# Altium PCB 3代7次发射系统.PcbDoc
Units mm, origin at the board's own origin, x right, y up, seen from the top; angles counter-clockwise.
Board outline 31.01 x 37.34 mm, 2 copper layers (Top Layer, Bottom Layer); 89 components, 63 nets, 272 pads, 114 vias.
Unrouted connection lines stored in the file: 1.
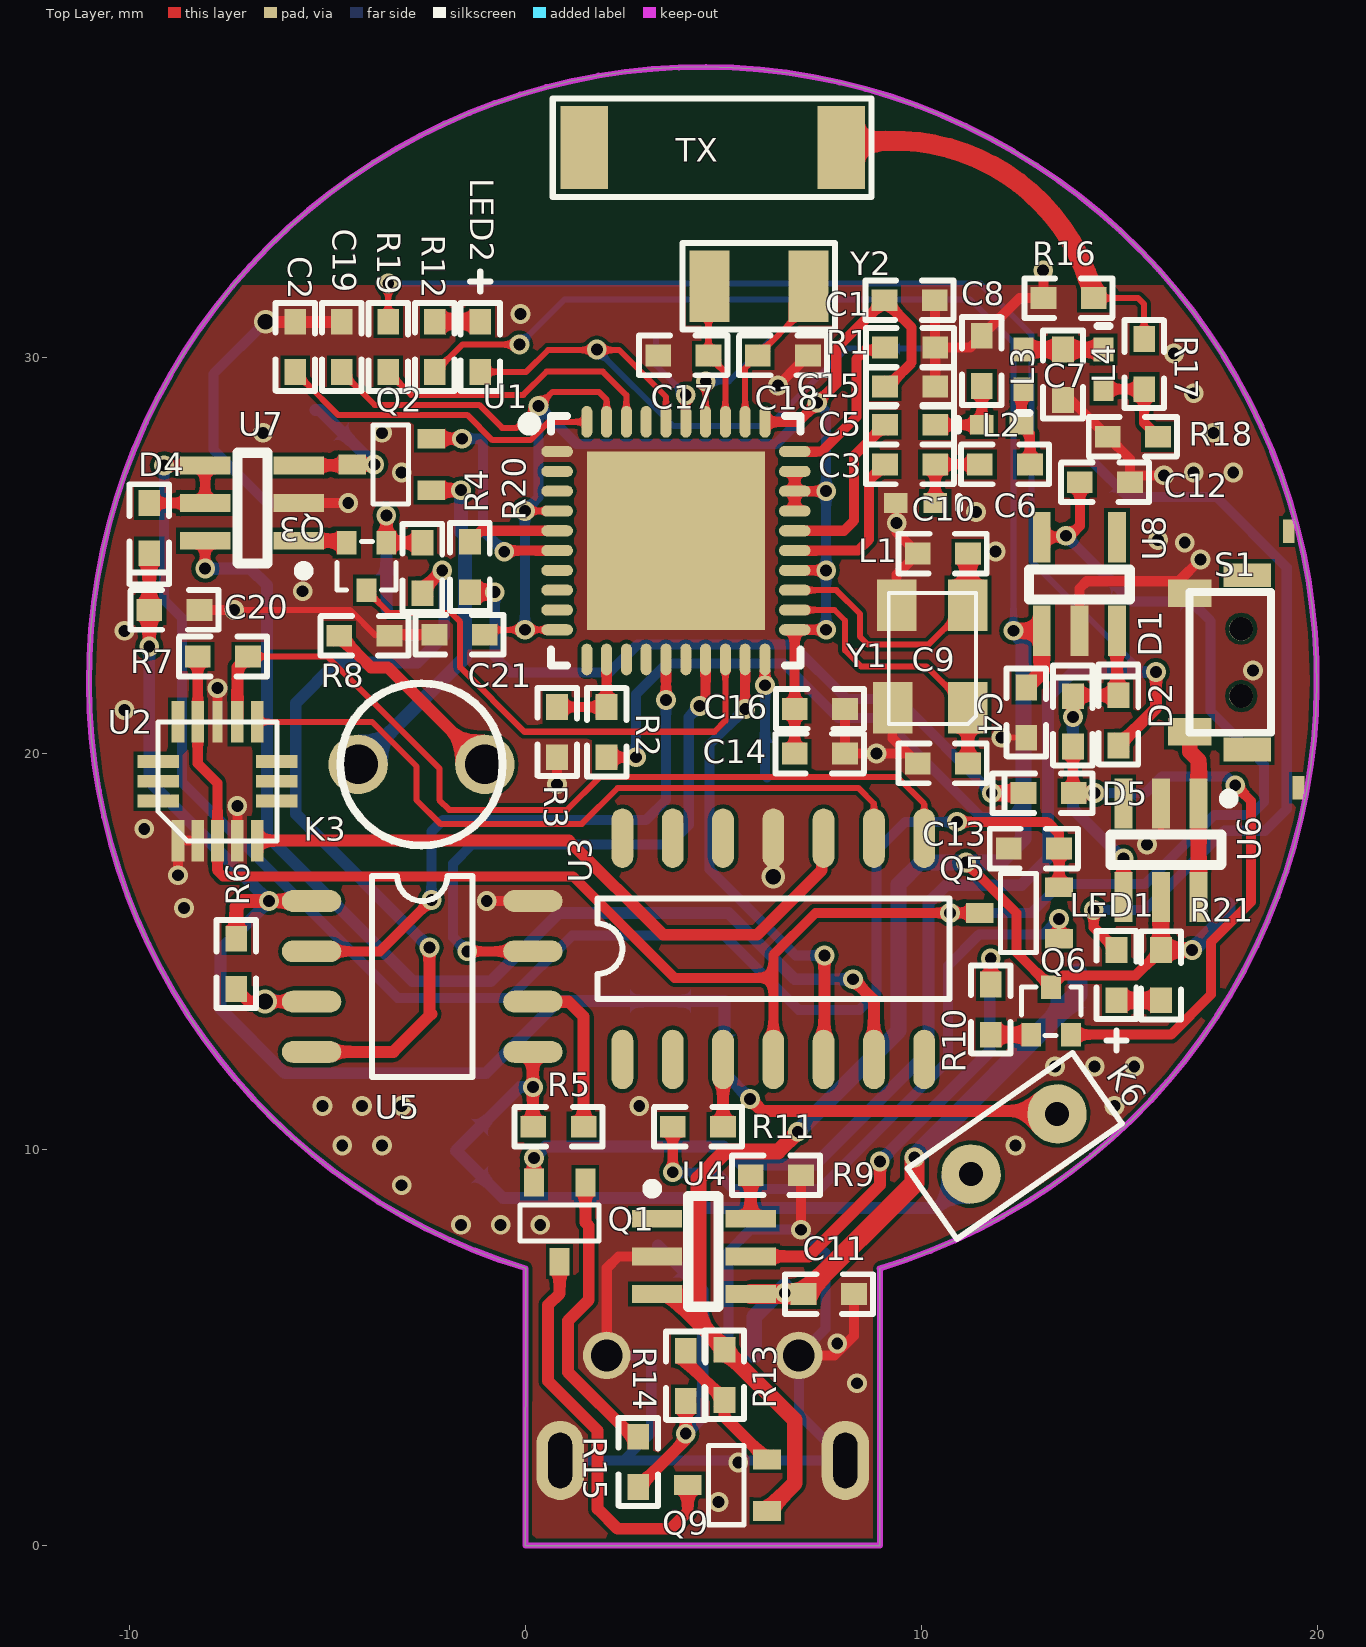
[diagram p0: Top Layer view]
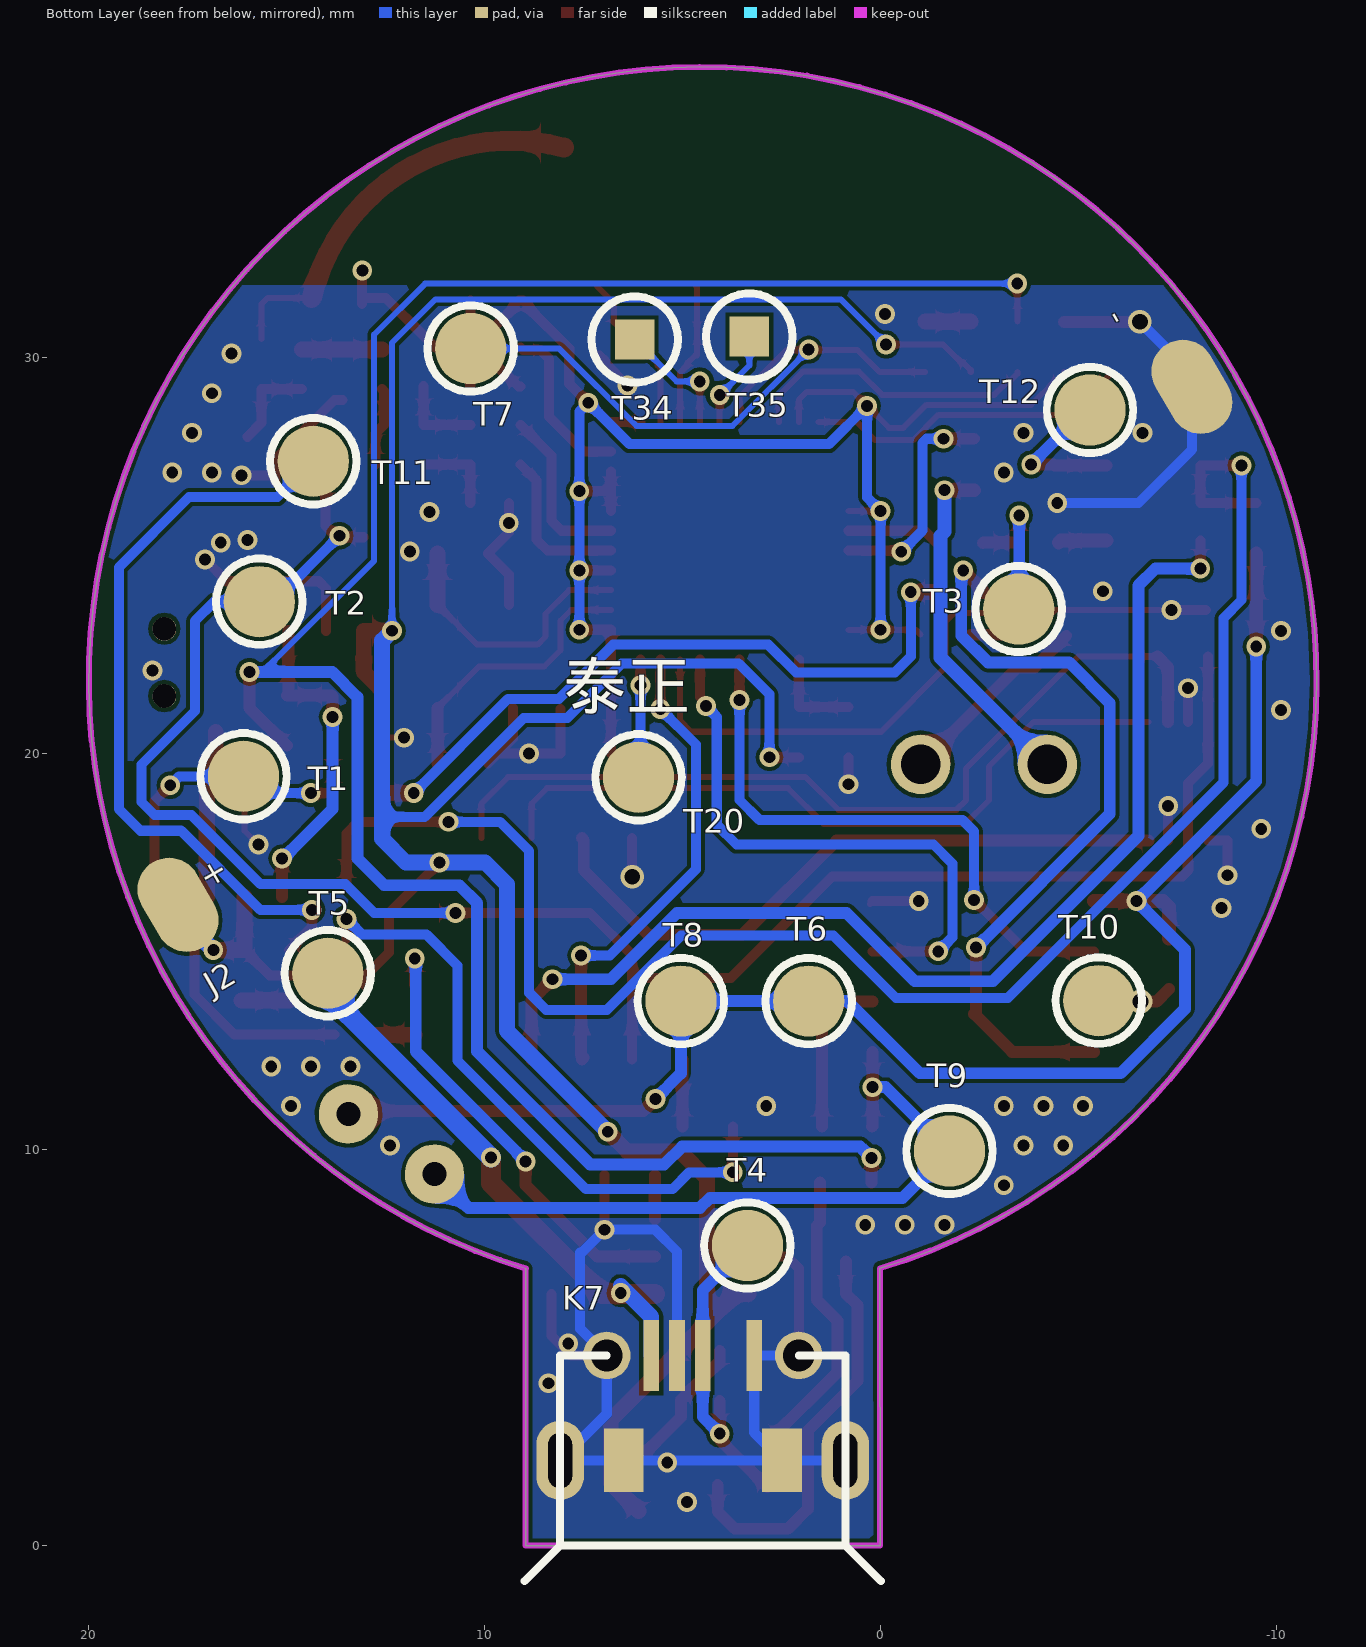
[diagram p1: Bottom Layer view, seen from below]

## Layer stack, top to bottom
Top Layer: signal copper 0.0356
Dielectric: dielectric 0.32, FR-4, Dk 4.8
Bottom Layer: signal copper 0.0356

## Board outline
0,0 0.003,7 cw(c4.475,21.841) 7.931,36.951 7.931,36.95 cw(c4.482,21.838) 8.947,6.996 8.95,6.985 8.95,0

## Design rules (kind name [scope] priority, off if disabled: settings)
Clearance [All] p1: gap=0.1
Clearance poly [All] p2 off: gap=0.15 // Protel DXP Scope 1 Expression Was: inpolygon
ComponentClearance [All] p1: gap=0.203 collisioncheckmode=3 verticalgap=0.254 showdistances=FALSE
FabricationTestPointUsage TestPointUsage [All] p1: valid=0 allowmultiple=FALSE
FabricationTestpoint Testpoint [(IsPad And (OnTopLayer Or OnBottomLayer))] p1 off: side=3 testpointundercomponent=TRUE minsize=1.016 maxsize=2.54 preferedsize=1.524 minholesize=0 maxholesize=1.016 preferedholesize=0.813 testpointgrid=0.025 allowsidetop=TRUE allowsidebottom=TRUE usegrid=TRUE gridtolerance=0 // Protel DXP Scope 1 Expression Was: (IsPad And (OnTopLayer Or OnBottomLayer))
FanoutControl Fanout_Small [All] p1 off: bgadir=Out bgaviamode=Centered fanoutstyle=Auto fanoutdirection=Alternating viagrid=0.025 // Protel DXP Scope 1 Expression Was: (CompPinCount < 5)   Fanout_Small (Default Rule)
FanoutControl Fanout_Default [All] p2: bgadir=Out bgaviamode=Centered fanoutstyle=Auto fanoutdirection=Alternating viagrid=0.025 // Fanout_Default (Default Rule)
FanoutControl Fanout_SOIC [All] p3 off: bgadir=Out bgaviamode=Centered fanoutstyle=Auto fanoutdirection=Alternating viagrid=0.025 // Protel DXP Scope 1 Expression Was: IsSOIC   Fanout_SOIC (Default Rule)
FanoutControl Fanout_BGA [All] p4 off: bgadir=Out bgaviamode=Centered fanoutstyle=Auto fanoutdirection=Alternating viagrid=0.025 // Protel DXP Scope 1 Expression Was: IsBGA   Fanout_BGA (Default Rule)
FanoutControl Fanout_LCC [All] p5 off: bgadir=Out bgaviamode=Centered fanoutstyle=Auto fanoutdirection=Alternating viagrid=0.025 // Protel DXP Scope 1 Expression Was: IsLCC   Fanout_LCC (Default Rule)
PlaneConnect [All] p1: planeconnectstyle=Direct reliefexpansion=0.508 reliefentries=4 reliefconductorwidth=0.254 reliefairgap=0.254
PolygonConnect [All] p1: connectstyle=Direct reliefconductorwidth=0.508 reliefentries=4 polygonreliefangle="90 Angle" airgapwidth=0.254
PolygonConnect via [All] p2 off: connectstyle=Direct reliefconductorwidth=0.254 reliefentries=4 polygonreliefangle="90 Angle" airgapwidth=0.254 // Protel DXP Scope 1 Expression Was: isvia
RoutingVias [All] p1: holewidth=0.3 width=0.5 viastyle="Through Hole" minholewidth=0.3 minwidth=0.5 maxholewidth=0.3 maxwidth=0.5
SilkscreenOverComponentPads [IsPad] p1: minsilkscreentomaskgap=0.254
SolderMaskExpansion [All] p1: expansion=0.102
Width [All] p1: maxlimit=1.27 minlimit=0.127 preferedwidth=0.254 minimp=50.000000 maximp=50.000000 favimp=50.000000
18 further rules are at their usual default settings.

## Components (designator, comment, footprint, x,y, rotation, side; value= is the part's Value field where it differs from the comment)
C1 "" 0402_1 10.338,31.445 r180 top
C2 "" 0402_1 -5.814,29.632 r90 top
C3 "" 0402_1 10.35,27.3 r180 top (schematic designator C11)
C4 "105" 0402_1 12.65,20.4 r90 top
C5 "15P" 0402_1 10.35,28.3 r180 top
C6 "104" 0402_1 11.475,27.3 r0 top
C7 "15P" 0402_1 13.575,28.93 r90 top
C8 "15P" 0402_1 11.525,30.55 r270 top
C9 "15P" 0402_1 11.175,19.75 r180 top
C10 "15P" 0402_1 11.175,25.05 r180 top
C11 "" 0402_1 7.025,6.35 r0 top
C12 "105" 0402_1 14,26.85 r0 top
C13 "105" 0402_1 13.475,17.6 r180 top
C14 "2.2uF" 0402_1 8.07,20 r180 top
C15 "15P" 0402_1 10.35,29.267 r180 top
C16 "15P" 0402_1 6.8,21.125 r0 top
C17 "15P" 0402_1 4.623,30.052 r180 top
C18 "15P" 0402_1 5.867,30.052 r0 top
C19 "15P" 0402_1 -4.639,29.632 r90 top
C20 "105" 0402_1 -9.5,23.625 r0 top
C21 "15P" 0402_1 -1.025,23 r180 top
D1 "Diode 1N4007" 0402D 13.825,20.175 r90 top
D2 "Diode 1N4007" 0402D 14.975,20.2 r90 top
D4 "Diode 1N4007" 0402D -9.5,26.325 r270 top
D5 "Diode 1N4007" 0402D 13.85,19 r180 top
J2 "" J1 17,14.875 r240 bottom
K3 "" K3 -1.025,19.725 r180 top
K6 "" K6 14.797,11.861 r215 top locked
K7 "K7" MIRO_USB 4.478,4.8 r180 bottom locked
L1 "Inductor" 0402-A 9.85,26.325 r180 top
L2 "Inductor" 0402-A 12.025,28.3 r0 top
L3 "Inductor" 0402-A 12.575,29.7 r90 top
L4 "Inductor" 0402-A 14.6,29.7 r270 top
LED1 "LED0" 0402LED 14.925,13.767 r180 top
LED2 "LED0" 0402LED -1.139,30.907 r0 top (schematic designator LED1)
Q1 "8550" SOT-323 0.864,7.169 r180 top
Q2 "8550" SOT-323 -4.375,27.3 r90 top
Q3 "9014" SOT-523 -4.013,24.125 r180 top
Q5 "8550" SOT-323 11.475,15.975 r90 top
Q6 "8550" SOT-523 13.275,14.1 r0 top
Q9 "LED0" ? 4.1,1.525 r90 top
R1 "4K7" 0402_1 10.35,30.25 r180 top
R2 "" 0402_1 2.05,21.175 r270 top
R3 "1M" 0402_1 0.8,19.905 r90 top
R4 "100K" 0402_1 -2.6,24.05 r90 top
R5 "10K" 0402_1 0.2,10.575 r0 top
R6 "10K" 0402_1 -7.3,15.325 r270 top
R7 "10K" 0402_1 -8.275,22.45 r0 top
R8 "4.7K" 0402_1 -4.7,22.975 r0 top
R9 "2K" 0402_1 5.687,9.35 r0 top
R10 "10K" 0402_1 11.75,12.9 r90 top
R11 "4.7K" 0402_1 3.72,10.575 r0 top
R12 "10K" 0402_1 -2.289,29.632 r90 top (schematic designator R11)
R13 "10K" 0402_1 5.025,3.675 r90 top (schematic designator R11)
R14 "8.2K" 0402_1 4.05,3.65 r90 top (schematic designator R11)
R15 "500" 0402_1 2.85,1.475 r90 top (schematic designator R11)
R16 "1.2M" 0402_1 14.35,31.5 r180 top
R17 "2K" 0402_1 15.625,30.47 r270 top
R18 "10K" 0402_1 15.975,28 r180 top
R19 "10K" 0402_1 -3.464,30.907 r270 top
R20 "10K" 0402_1 -1.4,24.075 r90 top
R21 "4K7" 0402_1 16.05,15.037 r270 top
S1 "" 轻触侧按键2*4*3.5 18.075,22.3 r90 top locked
T1 "Component_1" TP#1 16.075,19.425 r0 top
T2 "Component_1" TP#1 15.675,23.836 r0 top
T3 "Component_1" TP#1 -3.5,23.65 r0 top
T4 "Component_1" TP#1 3.35,7.575 r0 top
T5 "Component_1" TP#1 13.945,14.453 r0 top
T6 "Component_1" TP#1 1.803,13.748 r0 top
T7 "Component_1" TP#1 10.338,30.226 r90 top
T8 "Component_1" TP#1 5.029,13.748 r0 top
T9 "Component_1" TP#1 -1.753,9.963 r0 top
T10 "Component_1" TP#1 -5.525,13.76 r0 top
T11 "Component_1" TP#1 14.312,27.381 r0 top
T12 "Component_1" TP#1 -5.3,28.675 r0 top
T20 "Component_1" TP#1 6.1,19.4 r0 top
T34 "Component_1" TP#2 6.198,30.455 r0 top
T35 "Component_1" TP#2 3.302,30.531 r0 top
TX "Antenna" ANT2 7.98,35.3 r180 top
U1 "U3" LC-QFN-40_6X6X05P 3.8,25.375 r270 top locked
U2 "U4" U2-4 -8.775,17.8 r90 top locked
U3 "U3" SOP14 2.45,12.275 r90 top
U4 "" SOT23-6 3.325,8.25 r0 top (schematic designator U1)
U5 "" SO-8 -5.4,16.275 r0 top locked
U6 "" SOT23-6 17,18.737 r270 top
U7 "" SOT23-6 -5.725,25.375 r180 top
U8 "" SOT23-5 13,23.1 r90 top
Y1 "Y1" XTAL_FA-128 10.225,22.45 r180 top
Y2 "XTAL" Y2 4.648,31.801 r0 top

## Footprints (in the part's own frame and the unit in brackets; to place one, negate y for a bottom-side part, rotate by r counter-clockwise, add the part's x,y. Pads: shape width x height; smd on the part's side, far side on the other; paste and mask are expansions set on the pad)
0402-A [mm]
  rect 0.6x0.5 smd: 1(-0.5,0) 2(0.5,0)
  silkscreen extent -1.1,-0.15 -1.1,0.15, body extent -0.55,-0.3 0.55,0.3, height 0.55
0402_1 [mm]
  rect 0.65x0.55 smd: 1(0,0) 2(1.27,0)
  silkscreen extent -0.48,-0.5 1.75,0.5
0402D [mm]
  rect 0.65x0.55 smd: 1(0,0) 2(1.27,0)
  silkscreen extent -0.48,-0.5 2.05,0.5
0402LED [mm]
  rect 0.55x0.65 smd: 1(0,0) 2(0,-1.27)
  silkscreen extent -0.5,-1.75 0.5,1.27
ANT2 [mm]
  rect 1.2x2.1 smd: 1(0,0) 2(6.5,0)
  silkscreen extent -0.76,-1.24 7.29,1.24
J1 [mm]
  oval 2.5x1.6 smd: 1(-1.495,0.021) 2(-0.021,28.734)
K3 [mm]
  round 1.5 hole 1: 1(0,0) 2(3.2,0)
  silkscreen extent -0.45,-2.05 3.65,2.05
K6 [mm]
  round 1.5 hole 0.6: 1(1.675,0) 2(4.325,0)
  silkscreen extent 0.47,-1.04 5.56,1.14
LC-QFN-40_6X6X05P [mm]
  oval 0.28x0.8 smd mask+0.051: 1(-2.25,-3) 2(-1.75,-3) 3(-1.25,-3) 4(-0.75,-3) 5(-0.25,-3) 6(0.25,-3) 7(0.75,-3) 8(1.25,-3) 9(1.75,-3) 10(2.25,-3) 21(2.25,3) 22(1.75,3) 23(1.25,3) 24(0.75,3) 25(0.25,3) 26(-0.25,3) 27(-0.75,3) 28(-1.25,3) 29(-1.75,3) 30(-2.25,3)
  oval 0.8x0.28 smd mask+0.051: 11(3,-2.25) 12(3,-1.75) 13(3,-1.25) 14(3,-0.75) 15(3,-0.25) 16(3,0.25) 17(3,0.75) 18(3,1.25) 19(3,1.75) 20(3,2.25) 31(-3,2.25) 32(-3,1.75) 33(-3,1.25) 34(-3,0.75) 35(-3,0.25) 36(-3,-0.25) 37(-3,-0.75) 38(-3,-1.25) 39(-3,-1.75) 40(-3,-2.25)
  rect 4.5x4.5 smd mask+0.051: 41(0,0)
  silkscreen extent -3.15,-3.85 3.15,3.15
MIRO_USB [mm]
  rect 0.4x1.8 smd: 1(-1.3,0) 2(-0.65,0) 3(0,0) 5(1.3,0)
  oval 1.2x2 hole 0.6 slot 1.4 at 90 deg: 6(-3.6,-2.65) 7(3.6,-2.65)
  round 1.2 hole 0.8: 6(-2.425,0) 7(2.425,0)
  rect 1x1.6 smd: 6(-2,-2.65) 7(2,-2.65)
  silkscreen extent -4.5,-5.7 4.5,0
SO-8 [mm]
  oval 1.5x0.55 smd: 1(0,0) 2(0,-1.27) 3(0,-2.54) 4(0,-3.81) 5(5.588,-3.81) 6(5.588,-2.54) 7(5.588,-1.27) 8(5.588,0)
  silkscreen extent 1.52,-4.44 4.06,0.64
SOP14 [mm]
  oval 1.5x0.55 smd: 1(0,0) 2(0,-1.27) 3(0,-2.54) 4(0,-3.81) 5(0,-5.08) 6(0,-6.35) 7(0,-7.62) 8(5.588,-7.62) 9(5.588,-6.35) 10(5.588,-5.08) 11(5.588,-3.81) 12(5.588,-2.54) 13(5.588,-1.27) 14(5.588,0)
  silkscreen extent 1.52,-8.25 4.06,0.64
SOT23-5 [mm]
  rect 1.27x0.45 smd: 1(0,-0.041) 2(0,-0.991) 3(0,-1.941) 4(2.362,-1.941) 5(2.362,-0.041)
  silkscreen extent 0.79,-2.26 1.55,0.28
SOT23-6 [mm]
  rect 1.27x0.45 smd: 1(0,0) 2(0,-0.95) 3(0,-1.9) 4(2.362,-1.9) 5(2.362,-0.95) 6(2.362,0)
  silkscreen extent -0.25,-2.22 1.55,0.89
SOT-323 [mm]
  rect 0.5x0.7 smd: B(-0.65,-2) C(0,0) E(0.65,-2)
  silkscreen extent -1,-1.43 1,-0.53
SOT-523 [mm]
  rect 0.5x0.6 smd: B(-0.5,-1.2) C(0,0) E(0.5,-1.2)
  silkscreen extent -0.75,-1.22 0.75,0
TP#1 [mm]
  round 1.8 smd far side: 1(0,0)
TP#2 [mm]
  rect 1x1 smd far side: 1(0,0)
U2-4 [mm]
  rect 1.05x0.32 smd: 1(0,0) 2(0,-0.5) 3(0,-1) 4(0,-1.5) 5(0,-2) 9(3,-2) 10(3,-1.5) 12(3,-0.5) 13(3,0)
  round 0.7 on Top Overlay: 1(0.1,0.9)
  rect 0.32x1.05 smd: 6(1,-2.5) 7(1.5,-2.5) 8(2,-2.5) 14(2,0.5) 15(1.5,0.5) 16(1,0.5)
  rect 1.05x0.25 smd: 11(3,-1)
  silkscreen extent 0,-2.5 3,0.51
XTAL_FA-128 [mm]
  rect 1x1.3 smd mask+0.08: 1(-0.95,1.3) 2(0.85,-1.3) 3(-0.95,-1.3) 4(0.95,1.3)
  silkscreen extent -1.15,-1.6 1.05,1.7
Y2 [mm]
  rect 1x1.8 smd: 1(0,0) 2(2.5,0)
  silkscreen extent -0.69,-1.09 3.17,1.09
轻触侧按键2*4*3.5 [mm]
  rect 0.7x1.1 smd: 1(-1.75,1.3) 2(1.75,1.3)
  rect 0.6x1.2 smd: ""(-2.2,-0.15) ""(2.2,-0.15)
  round 0.6 hole 0.6 unplated: ""(-0.85,0) ""(0.85,0)
  silkscreen extent -1.78,-0.75 1.78,1.3
? [mm]
  rect 0.5x0.7 smd: a(-0.65,-2) g(0.65,-2) k(0,0)
  silkscreen extent -1,-1.43 1,-0.53

## Part data
C2 C3: library part Cap, "Capacitor"
K6: library part J1
R1: library part Res2, "Resistor"

## Free pads (board coordinates)
  rect 0.3x0.6 smd: 0(19.275,25.611) 0(19.525,19.136)

## Via types
v1: diameter 0.5, hole 0.3, Top Layer to Bottom Layer, tented both sides, 111 vias
v2: diameter 0.6, hole 0.4, Top Layer to Bottom Layer, tented both sides, 3 vias

## Nets (pads, with @x,y where several pads share a name; then routed paths per layer and width w, separated by ;. In a path a pad name is that pad's centre, name@x,y a point inside that pad or via, vN(x,y) a via of type N, cw(c..) or ccw(c..) an arc to the next point about the centre after c; other vN are vias at no path point)
+: C4.2 J2.1 Q6.C Q9.a R2.2 R12.1 R13.2 R21.1 U4.3 U6.5 U8.1 | length 80.6
  Top Layer w0.152: R12.1 -2.289,29.682 -2.091,29.88 -2.041,29.88 -1.593,30.328 v1(-0.152,30.328)
  Top Layer w0.254: R2.2 v1(2.795,19.905) ; v1(11.125,17.25) 12.4,15.975 12.4,14.975 Q6.C 13.575,14.4 15.413,14.4 R21.1
  Top Layer w0.4: U4.3 3.644,6.35 4.369,5.625 ; Q9.a 6.8,1.575 6.8,3.17 R13.2 5.025,4.969 4.369,5.625 ; v1(6.877,10.45) 6.377,9.95 5.05,9.95 4.369,9.269 4.369,5.625 ; v1(12.325,23.1) U8.1 13.041,22.061 C4.2 ; U6.5 R21.1 v1(16.837,15.037)
  Bottom Layer w0.152: v1(-0.152,30.328) 0.991,31.471 11.227,31.471 12.325,30.372 v1(12.325,23.1)
  Bottom Layer w0.254: v1(2.795,19.905) 2.795,21.5 3.57,22.275 6.525,22.275 7.9,20.9 9,20.9 11.5,18.4 12.575,18.4
  Bottom Layer w0.4: v1(6.877,10.45) 9.425,12.998 9.425,16.7 9.975,17.25 v1(11.125,17.25) 11.975,17.25 12.575,17.85 12.575,18.4 12.575,22.85 v1(12.325,23.1) ; v1(16.837,15.037) 17.729,15.929 J2.1
GND: C1.1 C2.2 C4.1 C7.1 C8.1 C9.2 C10.2 C11.2 C12.2 C13.2 C14.1 C15.1 C16.2 C17.2 C18.2 C19.2 C20.2 C21.2 J2.2 K7.2 K7.5 K7.6 K7.7 L1.2 R1.1 R3.1 R8.2 R9.2 R16.2 R18.2 S1.2 U1.1 U1.41 U2.1@-8.775,17.8 U2.2 U2.4 U2.11 U3.11 U4.2 U5.8 U6.2 U7.2 U8.2 Y1.2 Y1.4 | length 78.3
  Top Layer w0.152: v1(-7.355,23.625) -4.425,23.625 -3.775,22.975 R8.2 ; U5.8 U5.8@0.261,16.202 ; v1(12.025,20.4) C4.1 ; v1(15.7,17.7) 16.05,18.05 U6.2
  Top Layer w0.254: v1(-8.775,16.925) -8.775,17.8 U2.2 ; C20.2 v1(-7.355,23.625) ; U2.11 v1(-7.775,21.65) ; U2.4 v1(-7.275,18.675) ; U7.2 v1(-4.475,26.325) ; v1(-0.975,16.275) U5.8 ; v1(0.8,19.225) R3.1 ; K7.7@2.053,4.8 2.053,7.003 2.35,7.3 U4.2 ; v2(6.26,16.89) U3.11 ; v1(6.377,29.292) 6.939,29.854 6.939,29.904 7.087,30.052 C18.2 ; K7.6@6.903,4.8 7.8,4.8 8.295,5.295 C11.2 ; v1(6.957,7.975) R9.2 ; C16.2 C14.1 v1(8.863,20) C9.2@9.655,20 ; Y1.4 9.275,20.38 C9.2@9.655,20 ; Y1.2 9.375,24.52 C10.2 9.375,25.58 L1.2@9.375,26.325 ; C9.2 C9.2@9.655,20 ; C1.1 10.338,30.262 R1.1 ; C15.1 R1.1 ; v1(13.075,32.2) 13.085,32.19 R16.2@13.085,31.35 ; R16.2 12.475,31.5 C8.1 11.225,30.25 R1.1 ; C7.1 13.775,28.93 R18.2 15.27,27.435 C12.2@15.27,27.025 ; U8.2 13.991,24.166 14.175,24.35 16.5,24.35 v1(17.05,24.9) ; C12.2 C12.2@15.27,27.025 ; v1(16.125,27.025) C12.2@15.27,27.025
  Top Layer w0.3: v2(-6.56,30.902) C2.2 C19.2 ; R8.2 -3.405,23 C21.2
  Bottom Layer w0.254: v2(-6.56,30.902) -7.874,29.587 J2.2 -7.874,27.674 -6.525,26.325 v1(-4.475,26.325) ; K7.7@0.878,2.15 K7.7@2.478,2.15 ; K7.7@2.053,4.8 K7.5 3.178,2.85 K7.7@2.478,2.15 ; K7.2 5.128,7.425 5.678,7.975 v1(6.957,7.975) 7.532,7.4 7.575,7.4 7.575,5.472 6.903,4.8 6.903,3.325 8.078,2.15 6.478,2.15 K7.7@2.478,2.15
  other v1: 4.875,1.098 5.375,2.098 8.375,4.098 7.875,5.098 -1.625,8.098 -0.625,8.098 0.375,8.098 -3.125,9.098 -4.625,10.098 -3.625,10.098 12.375,10.098 -5.125,11.098 -4.125,11.098 -3.125,11.098 2.875,11.098 14.875,11.098 13.375,12.098 14.375,12.098 15.375,12.098 -8.625,16.098 -9.625,18.098 -10.125,21.098 18.375,22.098 -10.125,23.098 -5.625,24.098 11.875,25.098 16.65,25.325 15.975,25.394 9.375,25.825 11.375,26.098 -3.125,27.098 16.875,27.098 17.875,27.098 -6.625,28.098 -3.625,28.098 17.375,28.098 16.875,29.098 16.375,30.098 -0.125,31.098
NetC1_2: C1.2 C14.2 C15.2 C16.1 C19.1 C21.1 U1.4 U1.10 U1.21 U1.24 U1.27 U1.28 U1.29 U1.31 U1.39 | length 44.6
  Top Layer w0.152: C19.1 -4.639,29.582 -4.441,29.383 -4.391,29.383 -3.811,28.804 -1.168,28.804 -0.587,28.222 -0.226,28.222 v1(0.33,28.778) 0.684,29.132 1.854,29.132 2.05,28.936 U1.39 ; C21.1 -0.9,23.125 v1(-0.013,23.125) U1.10 ; v1(-0.013,26.125) U1.4
  Top Layer w0.254: U1.31 6.887,28.375 v1(7.368,28.857) 7.85,29.338 7.85,30.227 8.87,31.247 8.87,31.297 9.018,31.445 C1.2 9.118,31.445 9.266,31.297 9.266,31.247 9.754,30.759 9.754,29.87 9.298,29.415 9.278,29.415 9.13,29.267 C15.2 ; C14.2 C16.1 U1.21 v1(7.595,23.125) ; U1.24 v1(7.595,24.625) ; U1.27 U1.28 ; U1.29 U1.28 ; v1(7.595,26.625) U1.28
  Bottom Layer w0.254: v1(-0.013,23.125) v1(-0.013,26.125) 0.33,26.469 v1(0.33,28.778) 1.295,27.813 6.325,27.813 v1(7.368,28.857) 7.595,28.63 v1(7.595,26.625) v1@7.595,24.739 ; v1(7.595,23.125) v1(7.595,24.625) ; v1@7.652,24.682 v1@7.709,24.625
NetC2_1: C2.1 U1.40 | length 8.3
  Top Layer w0.152: C2.1 -5.814,29.582 -5.616,29.383 -5.566,29.383 -4.734,28.551 -1.47,28.551 -0.833,27.915 0.128,27.915 0.589,28.375 U1.40
NetC3_1: C3.1 C6.1 L1.1 | length 2.1
  Top Layer w0.254: L1.1 C3.1 C6.1
NetC3_2: C3.2 U1.25 | length 4.1
  Top Layer w0.254: U1.25 8.4,25.125 8.675,25.4 8.675,26.895 C3.2
NetC5_1: C5.1 C8.2 L2.1 | length 2.2
  Top Layer w0.254: C5.1 L2.1 C8.2
NetC5_2: C5.2 U1.26 | length 4.3
  Top Layer w0.254: U1.26 8.045,25.625 8.3,25.88 8.3,27.52 C5.2
NetC6_2: C6.2 L2.2 L3.1 | length 2
  Top Layer w0.254: L3.1 12.525,29.15 L2.2 12.745,28.08 C6.2
NetC7_2: C7.2 L3.2 L4.1 | length 2
  Top Layer w0.4: L3.2 C7.2 L4.1
NetC9_1: C9.1 U1.22 Y1.1 | length 7.2
  Top Layer w0.152: U1.22 7.805,23.625 8.07,23.36 8.07,22.605 8.475,22.2 10.125,22.2 Y1.1
  Top Layer w0.3: C9.1 Y1.1
NetC10_1: C10.1 U1.23 Y1.3 | length 7
  Top Layer w0.152: U1.23 7.85,24.125 8.45,23.525 8.45,22.95 8.65,22.75 10.175,22.75 Y1.3
  Top Layer w0.4: Y1.3 C10.1
NetC11_1: C11.1 K7.1 T5.1 U4.4 | length 14.6
  Top Layer w0.5: U4.4 C11.1 9.825,9.15 v1(9.825,9.8)
  Bottom Layer w0.4: K7.1 5.778,5.778 6.55,6.55 v1(6.55,6.375)
  Bottom Layer w0.5: v1(9.825,9.8) 13.945,13.92 T5.1
NetC12_1: C12.1 Q5.C R7.1 T2.1 U2.3 U2.12 U3.4 U8.5 | length 50
  Top Layer w0.254: R7.1 U2.12 -8.275,19.75 -7.775,19.25 U2.3 -7.775,17.036 -7.639,16.9 1.2,16.9 3.765,14.335 6.26,14.335 ; U3.4 6.26,14.335 ; Q5.C v1(10.725,15.975) 7.325,15.975 6.26,14.91 6.26,14.335 ; U8.5 13.712,25.462 14,25.75 C12.1
  Bottom Layer w0.254: v1(10.725,15.975) 12.775,15.975 13.5,16.7 15.644,16.7 17.394,18.45 18.325,18.45 18.65,18.775 18.65,19.725 17.3,21.075 17.3,23.35 16.814,23.836 T2.1 15.314,23.836 v1(13.65,25.5)
NetC13_1: C13.1 D4.1 Q5.E U7.4 U7.5 | length 43
  Top Layer w0.254: D4.1 U7.5 U7.4 v1(-9.125,27.275) ; v1(10.9,18.275) 13.175,18.275 13.475,17.975 C13.1 Q5.E
  Bottom Layer w0.254: v1(-9.125,27.275) -9.125,23.875 -8.675,23.425 -8.675,19.275 -3.225,13.825 -0.4,13.825 1.175,15.4 5.027,15.4 6.902,13.525 8.43,13.525 8.863,13.957 8.863,17.538 9.6,18.275 v1(10.9,18.275)
NetC17_1: C17.1 U1.33 Y2.1 | length 3.6
  Top Layer w0.152: Y2.1 4.623,31.775 C17.1 4.673,30.052 4.872,29.853 4.872,29.803 5.05,29.625 U1.33
NetC18_1: C18.1 U1.32 Y2.2 | length 4.1
  Top Layer w0.152: U1.32 5.55,29.735 5.619,29.803 5.619,29.853 5.817,30.052 C18.1 5.917,30.052 6.116,30.251 6.116,30.301 6.724,30.909 6.724,31.377 Y2.2
NetC20_1: C20.1 D4.2 K6.1 R6.1 T6.1 T8.1 U5.1 | length 40.7
  Top Layer w0.3: v1(5.675,11.275) 5.975,10.975 K6.1@13.35,10.975
  Top Layer w0.35: v1(-9.5,22.7) C20.1 D4.2 ; R6.1 -7.3,16.125 -7.15,16.275 v1(-6.475,16.275) U5.1
  Bottom Layer w0.3: v1(-9.5,22.7) -9.5,19.3 v1(-6.475,16.275) -7.7,15.05 -7.7,13.55 -6.075,11.925 -1,11.925 0.823,13.748 T6.1 T8.1 5.029,11.921 v1(5.675,11.275)
NetD1_1: D1.1 D5.1 Q6.E T1.1 | length 15.4
  Top Layer w0.254: Q6.E 16.3,12.9 17.314,13.914 17.314,15.239 18.325,16.25 18.325,18.8 v1(17.925,19.2) ; D1.1 13.825,19.025 D5.1 v1(14.375,19)
  Bottom Layer w0.254: v1(14.375,19) 15.65,19 T1.1 17.7,19.425 v1(17.925,19.2)
NetD1_2: D1.2 D2.2 U6.4 U8.3 | length 8.4
  Top Layer w0.3: v1(13.825,20.925) D1.2 13.85,21.47 D2.2 14.941,21.504 U8.3 ; U6.4 v1(15.1,17.35)
  Bottom Layer w0.3: v1(13.825,20.925) 13.825,18.6 15.075,17.35 v1(15.1,17.35)
NetD2_1: D2.1 Q1.E R19.1 | length 56
  Top Layer w0.152: R19.1 v1(-3.464,31.867)
  Top Layer w0.3: Q1.E v1(0.214,9.786) ; D2.1 15.925,21.15 v1(15.925,22.061)
  Bottom Layer w0.152: v1(-3.464,31.867) 11.491,31.867 12.776,30.582 12.776,24.867 15.582,22.061
  Bottom Layer w0.3: v1(0.214,9.786) 0.502,10.075 5,10.075 5.45,9.625 7.325,9.625 10.175,12.475 10.175,16.225 10.625,16.675 12.525,16.675 13.2,17.35 13.2,21.425 13.836,22.061 15.582,22.061 v1(15.925,22.061)
NetD5_2: D5.2 R20.1 | length 17.6
  Top Layer w0.4: R20.1 v1(-0.775,24.075) ; v1(11.775,19) D5.2
  Bottom Layer w0.254: v1(-0.775,24.075) -0.775,22.45 -0.375,22.05 2.125,22.05 2.825,22.75 6.739,22.75 8.114,21.375 9.4,21.375 v1(11.775,19)
NetK3_1: K3.1 R8.1 | length 5
  Top Layer w0.3: R8.1 -3.9,22.175 -3.475,22.175 K3.1
NetK3_2: K3.2 Q2.B | length 8.8
  Top Layer w0.35: Q2.B v1(-1.625,26.65)
  Bottom Layer w0.35: K3.2 -1.524,22.426 -1.524,25.499 -1.625,25.6 v1(-1.625,26.65)
NetK6_2: K6.2 R5.1 T9.1 U5.5 | length 18.5
  Top Layer w0.3: U5.5 v1(0.188,11.575) 0.188,10.587 R5.1
  Bottom Layer w0.3: v1(0.188,11.575) -0.141,11.575 T9.1 -0.564,8.775 4.3,8.775 4.55,8.525 10.399,8.525 K6.2
NetK7_3: K7.3 R14.1 R15.1 T4.1 | length 8.1
  Top Layer w0.3: R15.1 4.05,2.675 v1(4.05,2.825) R14.1
  Bottom Layer w0.3: T4.1 4.478,6.447 K7.3 4.478,3.253 v1(4.05,2.825)
NetL4_2: L4.2 R17.2 R18.1 | length 2.4
  Top Layer w0.254: L4.2 R17.2 15.625,28.35 R18.1
NetLED1_1: LED1.1 R21.2 | length 1.2
  Top Layer w0.4: LED1.1 R21.2 R21.2@16.125,13.767
NetLED1_2: LED1.2 T11.1 | length 19.3
  Top Layer w0.254: v1(14.35,16.05) 14.35,15.612 LED1.2
  Bottom Layer w0.254: T11.1 15.219,26.475 17.45,26.475 19.225,24.7 19.225,18.6 18.675,18.05 17.65,18.05 15.65,16.05 v1(14.35,16.05)
NetLED2_1: LED2.1 R12.2 | length 1.2
  Top Layer w0.4: R12.2 -2.284,30.907 LED2.1
NetLED2_2: LED2.2 T7.1 U1.36 | length 16.2
  Top Layer w0.152: LED2.2 0.02,29.637 0.573,30.189 2.367,30.189 3.55,29.006 U1.36
  Bottom Layer w0.152: v1(1.803,30.201) 3.734,28.27 5.537,28.27 6.147,28.27 8.103,30.226 T7.1
NetQ1_B: Q1.B R15.2 | length 7.5
  Top Layer w0.3: Q1.B 1.514,8.161 1.6,8.075 1.6,6.2 1.075,5.675 1.075,4.375 2.705,2.745 R15.2
NetQ1_C: Q1.C Q9.k | length 10.2
  Top Layer w0.3: Q1.C 0.864,6.364 0.575,6.075 0.575,4.153 1.825,2.903 1.825,0.925 2.325,0.425 3.67,0.425 4.1,0.855 Q9.k
NetQ2_C: Q2.C T12.1 U7.3 | length 4
  Top Layer w0.3: U7.3 -4.4,27.275 Q2.C v1(-3.815,27.3)
  Bottom Layer w0.3: T12.1 -5.19,28.675 v1(-3.815,27.3)
NetQ2_E: Q2.E U1.6 | length 5.7
  Top Layer w0.254: v1(-0.533,25.095) -0.504,25.125 U1.6
  Top Layer w0.3: Q2.E v1(-1.6,27.95)
  Bottom Layer w0.254: v1(-1.6,27.95) -1.175,27.95 -1.067,27.842 -1.067,25.629 v1(-0.533,25.095)
NetQ3_B: Q3.B R4.2 T3.1 | length 4
  Top Layer w0.3: v1(-3.513,26.013) Q3.B -2.605,25.325 R4.2
  Bottom Layer w0.3: v1(-3.513,26.013) -3.513,23.663 T3.1
NetQ3_C: Q3.C U1.18 | length 12.9
  Top Layer w0.152: Q3.C -3.436,23.549 -1.874,23.549 -1.65,23.325 -1.65,22.175 -0.025,20.55 4.775,20.55 5.05,20.825 U1.18
NetQ3_E: Q3.E U7.1 | length 1.2
  Top Layer w0.35: U7.1 -4.563,25.375 Q3.E
NetQ5_B: Q5.B R11.1 | length 15.8
  Top Layer w0.254: v1(3.72,9.425) R11.1 ; Q5.B v1(13.475,15.825)
  Bottom Layer w0.254: v1(3.72,9.425) 4.82,9.425 5.245,9 7.425,9 10.675,12.25 10.675,14.65 11.45,15.425 13.075,15.425 v1(13.475,15.825)
NetQ6_B: Q6.B R10.1 | length 1
  Top Layer w0.4: R10.1 Q6.B
NetQ9_g: Q9.g R13.1 R14.2 | length 3.6
  Top Layer w0.3: R14.2 4.05,4.65 R13.1 5.025,3.25 Q9.g
NetR1_2: R1.2 U1.30 | length 4.2
  Top Layer w0.254: U1.30 7.483,27.625 8.357,28.499 8.357,29.964 8.582,30.189 9.019,30.189 R1.2
NetR2_1: R2.1 R3.2 U1.12 | length 2.4
  Top Layer w0.254: R3.2 R2.1 U1.12
NetR4_1: R4.1 U5.4 | length 19.6
  Top Layer w0.3: U5.4 -3.335,12.465 -2.375,13.425 -2.425,13.475 v1(-2.425,15.1) ; R4.1 -2.6,24.125 v1(-2.1,24.625)
  Bottom Layer w0.3: v1(-2.425,15.1) -5.8,18.475 -5.8,21.275 -4.775,22.3 -2.725,22.3 -2.05,22.975 -2.05,24.575 v1(-2.1,24.625)
NetR5_2: R5.2 U5.6 | length 4.2
  Top Layer w0.3: U5.6 1.09,13.735 1.47,13.355 R5.2
NetR6_2: R6.2 T10.1 U5.3 | length 3.1
  Top Layer w0.3: R6.2 -6.98,13.735 v2(-6.575,13.735) U5.3
  Bottom Layer w0.3: v2(-6.575,13.735) -6.562,13.748 -5.538,13.748 T10.1
NetR7_2: R7.2 U2.10 U3.8 | length 22.4
  Top Layer w0.152: R7.2 -5,22.45 -4.2,21.65 -2.175,19.625 -2.175,18.825 -1.925,18.575 1.05,18.575 1.879,19.404 9.396,19.404 10.07,18.73 U3.8
  Top Layer w0.3: U2.10 -7.275,22.18 R7.2
NetR9_1: R9.1 U4.6 | length 1.1
  Top Layer w0.3: U4.6 R9.1
NetR10_2: R10.2 U4.5 | length 11.5
  Top Layer w0.3: U4.5 7.15,7.3 8.95,9.1 v1(8.95,9.7) ; R10.2 v1(11.75,14.825)
  Bottom Layer w0.3: v1(8.95,9.7) 11.725,12.475 11.725,14.8 v1(11.75,14.825)
NetR11_2: R11.2 U3.3 | length 1.7
  Top Layer w0.3: R11.2 U3.3
NetR16_1: R16.1 R17.1 TX.1 | length 10.5
  Top Layer w0.152: R16.1@14.355,31.5 15.475,31.5 15.625,31.35 R17.1
  Top Layer w0.508: TX.1 cw(c9.315,30.292) R16.1@14.355,31.5
NetR19_2: R19.2 U1.38 | length 7.4
  Top Layer w0.152: R19.2 -3.464,29.587 -3.266,29.388 -3.216,29.388 -2.884,29.056 -0.052,29.056 0.533,29.642 1.956,29.642 2.55,29.048 U1.38
NetR20_2: R20.2 U1.5 | length 2.3
  Top Layer w0.254: R20.2 -1.12,25.625 U1.5
NetS1_1: S1.1 U6.1 U6.6 | length 4.3
  Top Layer w0.4: S1.1 16.775,20.05 17,19.825 U6.1 U6.6
NetT20_1: T20.1 U1.20 | length 3
  Top Layer w0.254: v1(6.05,21.725) U1.20
  Bottom Layer w0.254: v1(6.05,21.725) 6.05,19.45 T20.1
NetT34_1: T34.1 U1.34 | length 3.1
  Top Layer w0.152: U1.34 U1.34 4.552,29.396 v1(4.555,29.398)
  Bottom Layer w0.152: v1(4.555,29.398) 5.141,29.398 T34.1
NetT35_1: T35.1 U1.35 | length 2.5
  Top Layer w0.152: U1.35 v1(4.05,29.05)
  Bottom Layer w0.152: T35.1 3.302,29.798 v1(4.05,29.05)
NetU1_15: U1.15 U5.2 | length 15.1
  Top Layer w0.254: U5.2 -3.67,15.005 v1(-2.375,16.3) ; v1(3.55,21.35) U1.15
  Bottom Layer w0.254: v1(-2.375,16.3) -2.375,18.025 -2.075,18.325 3.05,18.325 3.55,18.825 v1(3.55,21.35)
NetU1_17: U1.17 U5.7 | length 14.7
  Top Layer w0.254: v1(-1.47,15.005) U5.7 ; v1@4.4,21.275 4.55,21.425 U1.17
  Bottom Layer w0.254: v1(-1.47,15.005) -1.825,15.36 -1.825,17.225 -1.35,17.7 3.625,17.7 4.125,18.2 4.125,20.925 v1(4.4,21.2)
NetU1_19: U1.19 U3.5 | length 12.1
  Top Layer w0.254: v1(5.55,21.125) U1.19
  Top Layer w0.3: U3.5 7.482,12.323 7.55,12.391 v1(7.55,14.9)
  Bottom Layer w0.254: v1(5.55,21.125) 4.65,20.225 4.65,17.075 6.825,14.9 v1(7.55,14.9)
NetU2_5: U2.5 U3.10 | length 16.7
  Top Layer w0.3: U2.5 1.1,17.8 3.475,15.425 5.85,15.425 7.482,17.057 7.482,17.815 U3.10
NetU2_9: U2.9 U3.9 | length 18.5
  Top Layer w0.152: U2.9 -3.874,20.8 -2.75,19.676 -2.75,18.825 -2.15,18.225 1.425,18.225 2.325,19.125 8.412,19.125 8.8,18.737 U3.9
NetU3_6: U3.6 U7.6 | length 28.7
  Top Layer w0.254: v1(-8.087,24.669) U7.6
  Top Layer w0.3: v1(8.275,14.3) 8.8,13.775 U3.6
  Bottom Layer w0.3: v1(-8.087,24.669) -6.95,24.669 -6.525,24.244 -6.525,17.925 -2.85,14.25 -0.875,14.25 0.85,15.975 5.125,15.975 6.8,14.3 v1(8.275,14.3)
pads on no net: S1. TX.2 U1.2 U1.3 U1.7 U1.8 U1.9 U1.11 U1.13 U1.14 U1.16 U1.37 U2.1@-9.675,17.9 U2.6 U2.7 U2.8 U2.13 U2.14 U2.15 U2.16 U3.1 U3.2 U3.7 U3.12 U3.13 U3.14 U4.1 U6.3 U8.4

## Polygon pours and split planes (outlines as drawn)
GND on Top Layer "Top Layer-GND" (solid, remove dead copper, pour order 8): 0,0 0.003,7 cw(c4.475,21.841) 7.931,36.951 7.931,36.95 cw(c4.482,21.838) 8.947,6.996 8.95,6.985 8.95,0
GND on Top Layer "TOP-No Net 1" (hatched 90Degree grid 0.102 track 0.127, remove dead copper, pour order 2): 17.375,23.65 17.375,25.175 16.9,25.65 15.775,25.65 15.625,25.5 15.625,23.775 15.75,23.65
GND on Bottom Layer "Bottom Layer-GND" (solid, remove dead copper, pour order 10): 0,0 0.003,7 cw(c4.475,21.841) 7.931,36.951 7.931,36.95 cw(c4.482,21.838) 8.947,6.996 8.95,6.985 8.95,0

## Keep-outs
Keep-Out Layer:
  lines w0.15: 7.931,36.95 cw(c4.482,21.838) 8.947,6.996 ; 7.931,36.951 ccw(c4.475,21.841) 0.003,7 0,0 8.95,0 8.95,6.985

## Other copper
Multi-Layer:
  pour cut-out: 16.469,31.825 -7.527,31.825 -7.527,38.025 ccw(c-7.576,38.025) -7.541,38.06 16.469,38.06

## Silkscreen, mask and mechanical layers (free items; w line width, h text height)
Bottom Overlay:
  text "-" at -5.685,31.02 h0.6 r60
  text "泰正" at 8,20.75 h2
  text "+" at 17.217,17.127 h0.6 r60